# EAGLE board Electronics_Design_v1 v37 (EAGLE 9.7.0), part 1 of 2
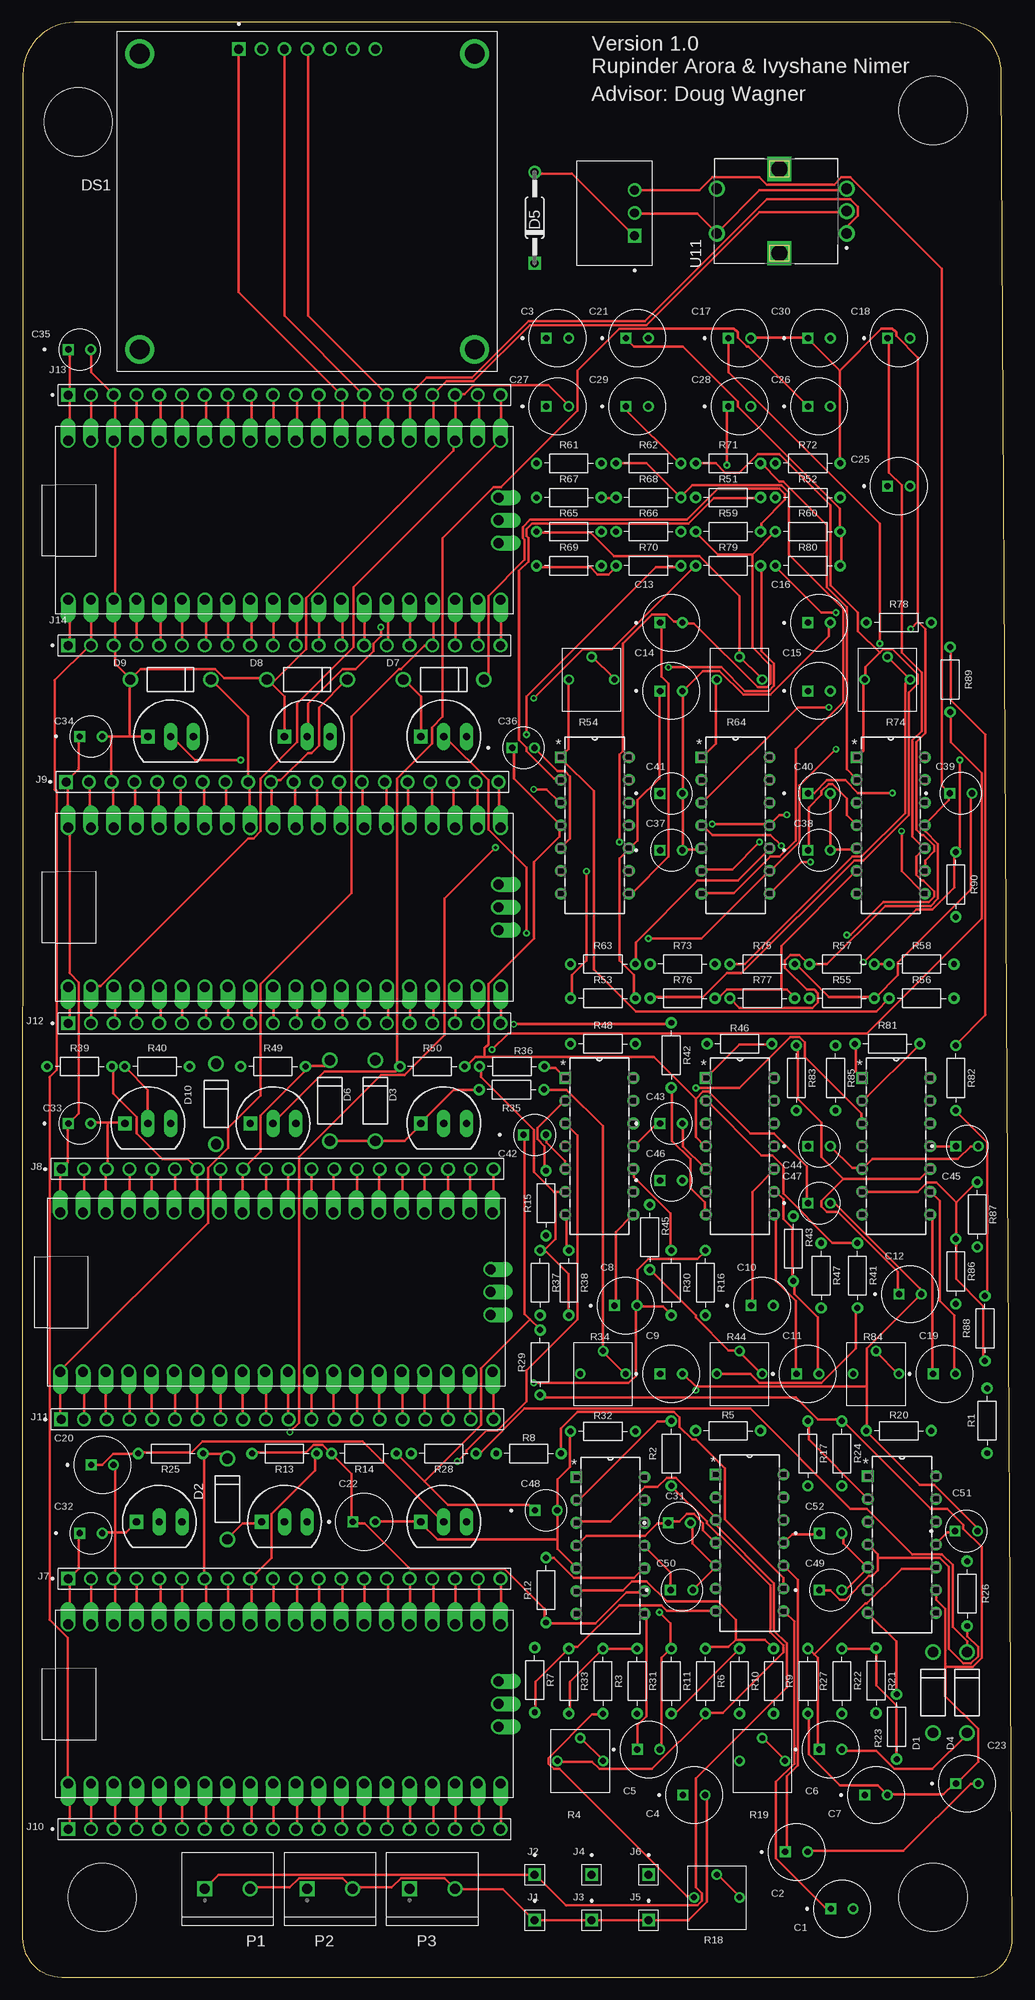
[diagram p0: board, top side]
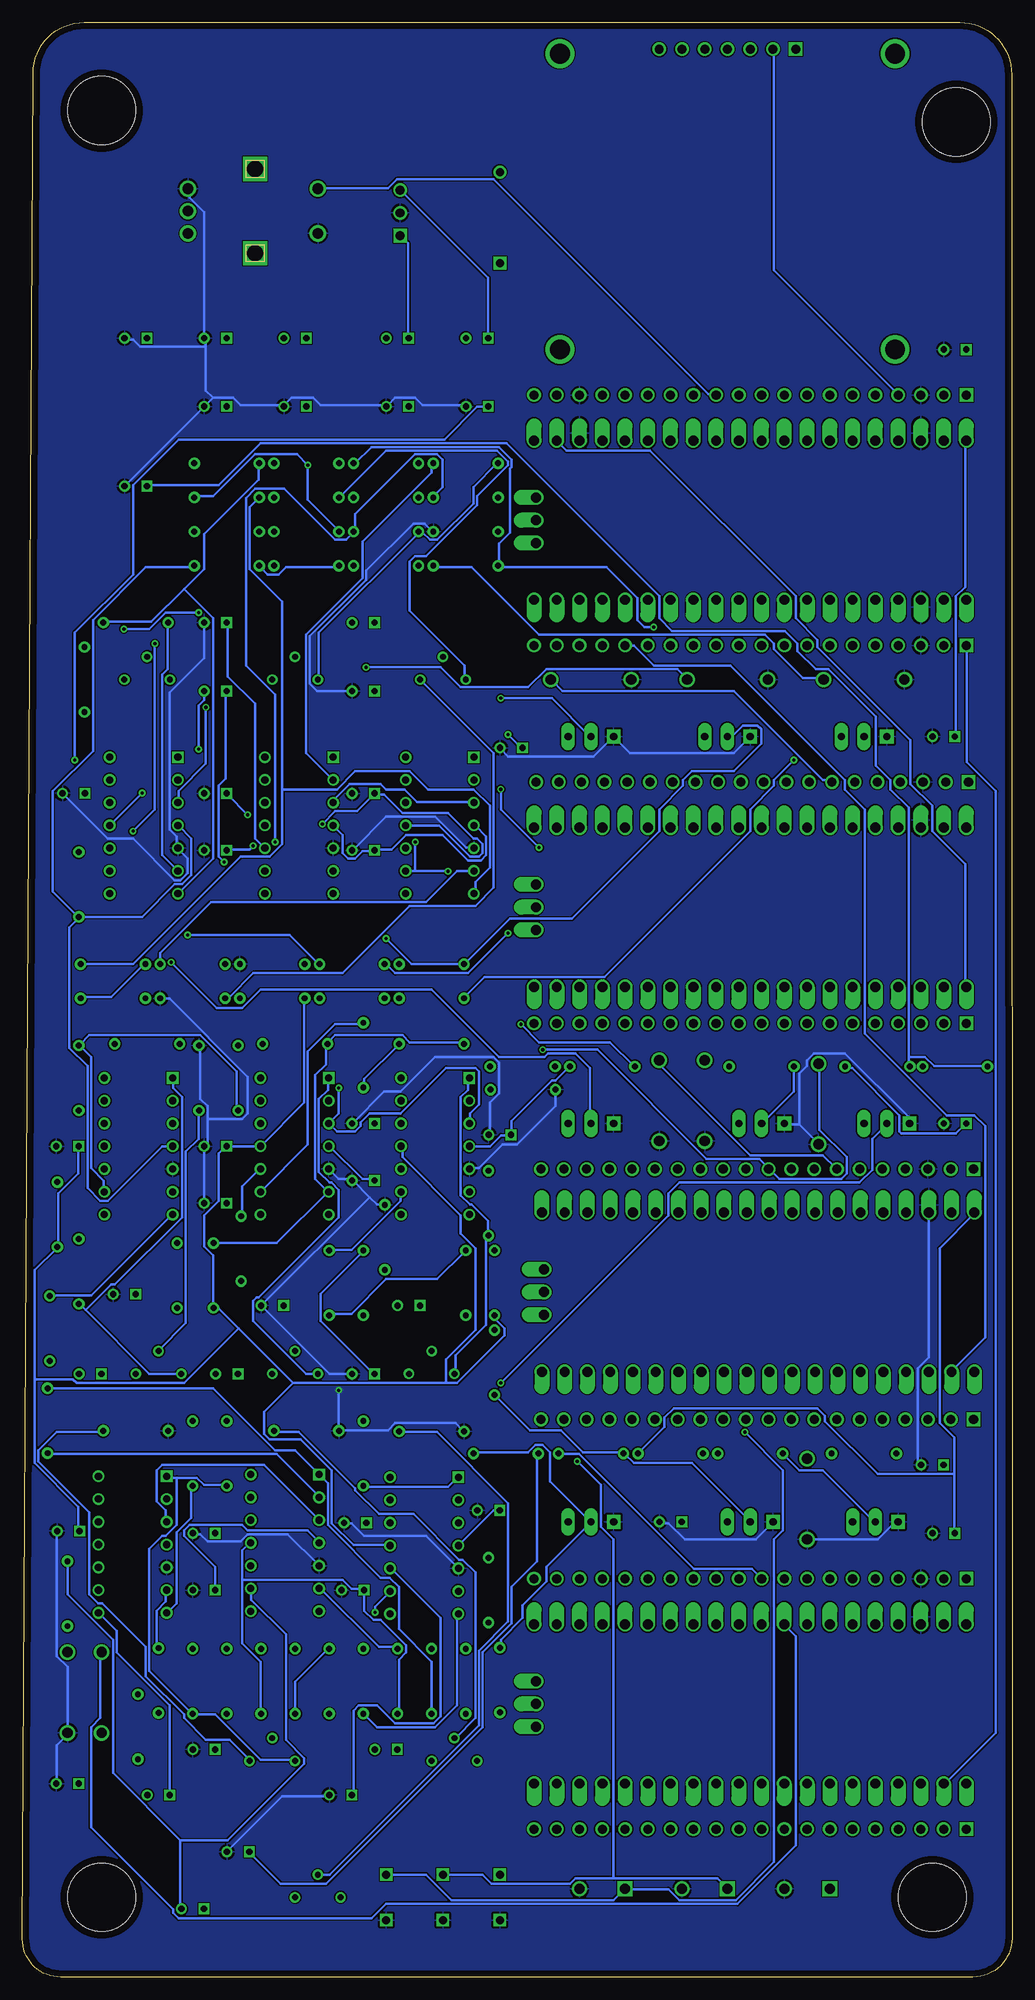
[diagram p1: board, bottom side, seen from below]

Size 110.47 x 218.11 mm. Coordinates in mm from the lower left corner, seen from the top.
Outline: 0.06,212.3 0,4.36 arc90 4.38,0 106.22,0 arc90 110.47,4.28 109.26,212.46 arc90 103.58,218.11 5.84,218.11 arc90 0.06,212.3
Copper layers (1*16): Top / Bottom
Stack-up Default Layer Stack: Top User Defined 0.035mm / Dielectric-1 User Defined 1.5mm / Bottom User Defined 0.035mm
Design rules "default *": minimum track width 10mil, minimum drill 0.35mm, track to track 6mil, track to pad 6mil, pad to pad 6mil, via to via 6mil, smd to smd 6mil, copper to edge 30mil, drill to drill 6mil, minimum pad ring 10mil, minimum via ring 8mil, stop-mask expansion 4mil, vias tented up to drill 0mil, thermal gap 10mil
Holes 7.62 mm at 101.63,208.28 6.24,207.01 8.92,8.89 101.63,8.89

## Footprints (pad centres in the part's own frame; a part is rotated, then mirrored left to right if it is on the bottom)
CAPPRD250W50D630H1250 = drill 0.7 pad 1.05: N 1.25,0 | drill 0.7 pad 1.05 square: P -1.25,0
FAIRCHILD_SEMICONDUCTOR_1N4728A_0 = drill 1.15 pad 1.65: 1 -4.5,0; 2 4.5,0
DO35-4 = drill 0.9 pad 1.422: A 5.08,0 | drill 0.9 pad 1.422 square: C -5.08,0
LCD_AOM12864A0-1.54WW-ANO = drill 1 square: 1 -7.62,17 | drill 1: 2 -5.08,17; 3 -2.54,17; 4 0,17; 5 2.54,17; 6 5.08,17; 7 7.62,17 | drill 2.2: P1 -18.7,16.5; P2 18.7,16.5; P3 -18.7,-16.5; P4 18.7,-16.5
TE_103321-1 = drill 0.89 square: 1 0,0
TE_5-644456-0 = drill 1.02 pad 1.37 square: 1 0,0 | drill 1.02 pad 1.37: 2 2.54,0; 3 5.08,0; 4 7.62,0; 5 10.16,0; 6 12.7,0; 7 15.24,0; 8 17.78,0; 9 20.32,0; 10 22.86,0; 11 25.4,0; 12 27.94,0; 13 30.48,0; 14 33.02,0; 15 35.56,0; 16 38.1,0; 17 40.64,0; 18 43.18,0; 19 45.72,0; 20 48.26,0
TE_282837-2 = drill 1.1 square: 1 -2.54,0 | drill 1.1: 2 2.54,0
RPI_PICO_TH = drill 1.1 pad 1.6 offset: 3V3 8.89,13.97; 3V3_EN 8.89,16.51; ADC_VREF 8.89,11.43; AGND 8.89,6.35; GND@1 -8.89,19.05; GND@2 -8.89,6.35; GND@3 -8.89,-6.35; GND@4 -8.89,-19.05; GND@5 0,-23.9; GND@6 8.89,-19.05; GND@7 8.89,-6.35; GND@8 8.89,19.05; GP0 -8.89,24.13; GP1 -8.89,21.59; GP2 -8.89,16.51; GP3 -8.89,13.97; GP4 -8.89,11.43; GP5 -8.89,8.89; GP6 -8.89,3.81; GP7 -8.89,1.27; GP8 -8.89,-1.27; GP9 -8.89,-3.81; GP10 -8.89,-8.89; GP11 -8.89,-11.43; GP12 -8.89,-13.97; GP13 -8.89,-16.51; GP14 -8.89,-21.59; GP15 -8.89,-24.13; GP16 8.89,-24.13; GP17 8.89,-21.59; GP18 8.89,-16.51; GP19 8.89,-13.97; GP20 8.89,-11.43; GP21 8.89,-8.89; GP22 8.89,-3.81; GP26_A0 8.89,1.27; GP27_A1 8.89,3.81; GP28_A2 8.89,8.89; RUN 8.89,-1.27; SWCLK -2.54,-23.9; SWDIO 2.54,-23.9; VBUS 8.89,24.13; VSYS 8.89,21.59
CONV_R-78E5.0-1.0 = drill 1 square: 1 -2.54,-2.25 | drill 1: 2 0,-2.25; 3 2.54,-2.25
RESAD724W46L381D178B = drill 0.66 pad 1.26: 1 -3.62,0; 2 3.62,0
3362P-1-103LF = drill 0.66: 1 -2.54,0; 2 0,2.54; 3 2.54,0
LP3 = drill 0.813 pad 1.524 square: 1 -3.81,0 | drill 0.813 pad 1.524 long: 2 -1.27,0; 3 1.27,0
N14 = drill 0.787 pad 1.295 square: 1 -7.62,15.24 | drill 0.787 pad 1.295: 2 -7.62,12.7; 3 -7.62,10.16; 4 -7.62,7.62; 5 -7.62,5.08; 6 -7.62,2.54; 7 -7.62,0; 8 0,0; 9 0,2.54; 10 0,5.08; 11 0,7.62; 12 0,10.16; 13 0,12.7; 14 0,15.24
CUI_ACZ11BR1E-20FD1-20C = drill 1.2: A -2.5,-7.5; B 2.5,-7.5; C 0,-7.5; S1 -2.5,7; S2 2.5,7 | drill 1.8 square: P1 -4.7,0; P2 4.7,0

## Placement (x,y rotation side)
C1  2.2nF  [CAPPRD250W50D630H1250]  91.47,7.62 0 top
C2  1nF  [CAPPRD250W50D630H1250]  86.39,13.97 0 top
C3  22uF  [CAPPRD250W50D630H1250]  59.72,182.88 0 top
C4  1nF  [CAPPRD250W50D630H1250]  74.96,20.32 0 top
C5  2.2nF  [CAPPRD250W50D630H1250]  69.88,25.4 0 top
C6  1nF  [CAPPRD250W50D630H1250]  90.2,25.4 0 top
C7  2.2nF  [CAPPRD250W50D630H1250]  95.28,20.32 0 top
C8  2.2nF  [CAPPRD250W50D630H1250]  67.34,74.93 0 top
C9  1nF  [CAPPRD250W50D630H1250]  72.42,67.31 0 top
C10  1nF  [CAPPRD250W50D630H1250]  82.58,74.93 0 top
C11  2.2nF  [CAPPRD250W50D630H1250]  87.66,67.31 0 top
C12  1nF  [CAPPRD250W50D630H1250]  99.09,76.2 0 top
C13  2.2nF  [CAPPRD250W50D630H1250]  72.42,151.13 0 top
C14  1nF  [CAPPRD250W50D630H1250]  72.42,143.51 0 top
C15  2.2nF  [CAPPRD250W50D630H1250]  88.93,143.51 0 top
C16  1nF  [CAPPRD250W50D630H1250]  88.93,151.13 0 top
C17  2.2nF  [CAPPRD250W50D630H1250]  80.04,182.88 0 top
C18  1nF  [CAPPRD250W50D630H1250]  97.82,182.88 0 top
C19  2.2uF  [CAPPRD250W50D630H1250]  102.9,67.31 0 top
C20  2.2uF  [CAPPRD250W50D630H1250]  8.92,57.15 0 top
C21  10uF  [CAPPRD250W50D630H1250]  68.61,182.88 0 top
C22  2.2uF  [CAPPRD250W50D630H1250]  38.13,50.8 0 top
C23  2.2uF  [CAPPRD250W50D630H1250]  105.44,21.59 0 top
C25  2.2uF  [CAPPRD250W50D630H1250]  97.82,166.37 0 top
C26  2.2uF  [CAPPRD250W50D630H1250]  88.93,175.26 0 top
C27  2.2uF  [CAPPRD250W50D630H1250]  59.72,175.26 0 top
C28  2.2uF  [CAPPRD250W50D630H1250]  80.04,175.26 0 top
C29  2.2uF  [CAPPRD250W50D630H1250]  68.61,175.26 0 top
C30  2.2uF  [CAPPRD250W50D630H1250]  88.93,182.88 0 top
C31  0.1uF  [CAPPRD250W50D630H1250]  73.32,50.69 0 top
C32  0.1uF  [CAPPRD250W50D630H1250]  7.65,49.53 0 top
C33  0.1uF  [CAPPRD250W50D630H1250]  6.38,95.25 0 top
C34  0.1uF  [CAPPRD250W50D630H1250]  7.65,138.43 0 top
C35  0.1uF  [CAPPRD250W50D630H1250]  6.38,181.61 0 top
C36  0.1uF  [CAPPRD250W50D630H1250]  55.91,137.16 0 top
C37  0.1uF  [CAPPRD250W50D630H1250]  72.42,125.73 0 top
C38  0.1uF  [CAPPRD250W50D630H1250]  88.93,125.73 0 top
C39  0.1uF  [CAPPRD250W50D630H1250]  104.75,132.09 0 top
C40  0.1uF  [CAPPRD250W50D630H1250]  88.93,132.08 0 top
C41  0.1uF  [CAPPRD250W50D630H1250]  72.42,132.08 0 top
C42  0.1uF  [CAPPRD250W50D630H1250]  57.18,93.98 0 top
C43  0.1uF  [CAPPRD250W50D630H1250]  72.42,95.25 0 top
C44  0.1uF  [CAPPRD250W50D630H1250]  88.93,92.71 0 top
C45  0.1uF  [CAPPRD250W50D630H1250]  105.44,92.71 0 top
C46  0.1uF  [CAPPRD250W50D630H1250]  72.42,88.9 0 top
C47  0.1uF  [CAPPRD250W50D630H1250]  88.93,86.36 0 top
C48  0.1uF  [CAPPRD250W50D630H1250]  58.45,52.07 0 top
C49  0.1uF  [CAPPRD250W50D630H1250]  90.2,43.18 0 top
C50  0.1uF  [CAPPRD250W50D630H1250]  73.59,43.18 0 top
C51  0.1uF  [CAPPRD250W50D630H1250]  105.34,49.77 0 top
C52  0.1uF  [CAPPRD250W50D630H1250]  90.2,49.53 0 top
D1  FAIRCHILD_SEMICONDUCTOR_1N4728AFAIRCHILD_SEMICONDUCTOR_1N4728A_0_0  [FAIRCHILD_SEMICONDUCTOR_1N4728A_0]  101.63,31.75 90 top
D2  FAIRCHILD_SEMICONDUCTOR_1N4728AFAIRCHILD_SEMICONDUCTOR_1N4728A_0_0  [FAIRCHILD_SEMICONDUCTOR_1N4728A_0]  22.89,53.34 90 top
D3  FAIRCHILD_SEMICONDUCTOR_1N4728AFAIRCHILD_SEMICONDUCTOR_1N4728A_0_0  [FAIRCHILD_SEMICONDUCTOR_1N4728A_0]  39.4,97.79 90 top
D4  FAIRCHILD_SEMICONDUCTOR_1N4728AFAIRCHILD_SEMICONDUCTOR_1N4728A_0_0  [FAIRCHILD_SEMICONDUCTOR_1N4728A_0]  105.44,31.75 90 top
D5  1N914.4  [DO35-4]  57.18,196.32 90 top
D6  FAIRCHILD_SEMICONDUCTOR_1N4728AFAIRCHILD_SEMICONDUCTOR_1N4728A_0_0  [FAIRCHILD_SEMICONDUCTOR_1N4728A_0]  34.32,97.79 90 top
D7  FAIRCHILD_SEMICONDUCTOR_1N4728AFAIRCHILD_SEMICONDUCTOR_1N4728A_0_0  [FAIRCHILD_SEMICONDUCTOR_1N4728A_0]  47.02,144.78 0 top
D8  FAIRCHILD_SEMICONDUCTOR_1N4728AFAIRCHILD_SEMICONDUCTOR_1N4728A_0_0  [FAIRCHILD_SEMICONDUCTOR_1N4728A_0]  31.78,144.78 0 top
D9  FAIRCHILD_SEMICONDUCTOR_1N4728AFAIRCHILD_SEMICONDUCTOR_1N4728A_0_0  [FAIRCHILD_SEMICONDUCTOR_1N4728A_0]  16.54,144.78 0 top
D10  FAIRCHILD_SEMICONDUCTOR_1N4728AFAIRCHILD_SEMICONDUCTOR_1N4728A_0_0  [FAIRCHILD_SEMICONDUCTOR_1N4728A_0]  21.62,97.42 90 top
DS1  OLED Display  [LCD_AOM12864A0-1.54WW-ANO]  31.78,198.12 0 top
J1  103321-1  [TE_103321-1]  57.18,6.35 0 top
J2  103321-1  [TE_103321-1]  57.18,11.43 0 top
J3  103321-1  [TE_103321-1]  63.53,6.35 0 top
J4  103321-1  [TE_103321-1]  63.53,11.43 0 top
J5  103321-1  [TE_103321-1]  69.88,6.35 0 top
J6  103321-1  [TE_103321-1]  69.88,11.43 0 top
J7  5-644456-0  [TE_5-644456-0]  5.11,44.45 0 top
J8  5-644456-0  [TE_5-644456-0]  4.32,90.16 0 top
J9  5-644456-0  [TE_5-644456-0]  4.88,133.35 0 top
J10  5-644456-0  [TE_5-644456-0]  5.11,16.51 0 top
J11  5-644456-0  [TE_5-644456-0]  4.32,62.23 0 top
J12  5-644456-0  [TE_5-644456-0]  5.11,106.42 0 top
J13  5-644456-0  [TE_5-644456-0]  5.11,176.53 0 top
J14  5-644456-0  [TE_5-644456-0]  5.11,148.59 0 top
P1  282837-2  [TE_282837-2]  22.89,9.84 0 top
P2  282837-2  [TE_282837-2]  34.32,9.84 0 top
P3  282837-2  [TE_282837-2]  45.75,9.84 0 top
PICO-1  Piico Pi  [RPI_PICO_TH]  29.24,30.48 90 top
PICO-2  [RPI_PICO_TH]  28.35,76.44 90 top
PICO-3  [RPI_PICO_TH]  29.24,119.38 90 top
PICOCENTRAL  [RPI_PICO_TH]  29.24,162.56 90 top
PS1  R-78E5.0-1.0  [CONV_R-78E5.0-1.0]  66.07,196.85 90 top
R1  560k  [RESAD724W46L381D178B]  107.67,62.09 270 top
R2  560k  [RESAD724W46L381D178B]  72.42,58.42 90 top
R3  1.8k  [RESAD724W46L381D178B]  64.8,33.02 90 top
R4  10k  [3362P-1-103LF]  62.26,24.13 0 top
R5  100  [RESAD724W46L381D178B]  78.77,60.96 180 top
R6  1.8k  [RESAD724W46L381D178B]  76.23,33.02 90 top
R7  100k  [RESAD724W46L381D178B]  57.18,33.14 90 top
R8  100k  [RESAD724W46L381D178B]  56.51,58.42 180 top
R9  5.6k  [RESAD724W46L381D178B]  83.85,33.02 90 top
R10  1.8k  [RESAD724W46L381D178B]  80.04,33.02 90 top
R11  100k  [RESAD724W46L381D178B]  72.42,33.02 90 top
R12  100k  [RESAD724W46L381D178B]  58.45,43.18 90 top
R13  150  [RESAD724W46L381D178B]  29.24,58.42 0 top
R14  200  [RESAD724W46L381D178B]  38.13,58.42 0 top
R15  560k  [RESAD724W46L381D178B]  58.45,86.36 90 top
R16  100k  [RESAD724W46L381D178B]  76.23,77.47 90 top
R17  560k  [RESAD724W46L381D178B]  87.66,58.42 90 top
R18  10k  [3362P-1-103LF]  77.5,8.89 0 top
R19  10k  [3362P-1-103LF]  82.58,24.13 0 top
R20  100  [RESAD724W46L381D178B]  97.82,60.96 180 top
R21  1.8k  [RESAD724W46L381D178B]  91.47,33.02 90 top
R22  5.6k  [RESAD724W46L381D178B]  95.28,33.09 90 top
R23  1.8k  [RESAD724W46L381D178B]  97.57,27.94 90 top
R24  100k  [RESAD724W46L381D178B]  91.47,58.42 90 top
R25  150  [RESAD724W46L381D178B]  16.54,58.42 0 top
R26  200  [RESAD724W46L381D178B]  105.44,42.78 270 top
R27  100k  [RESAD724W46L381D178B]  87.66,33.02 90 top
R28  150  [RESAD724W46L381D178B]  47.02,58.42 0 top
R29  200  [RESAD724W46L381D178B]  57.78,68.58 90 top
R30  100k  [RESAD724W46L381D178B]  72.42,77.47 90 top
R31  5.6k  [RESAD724W46L381D178B]  68.61,33.02 90 top
R32  100  [RESAD724W46L381D178B]  64.8,60.89 180 top
R33  1.8k  [RESAD724W46L381D178B]  60.99,33.02 90 top
R34  10k  [3362P-1-103LF]  64.8,67.31 0 top
R35  100  [RESAD724W46L381D178B]  54.6,99.02 180 top
R36  1.8k  [RESAD724W46L381D178B]  54.64,101.6 180 top
R37  5.6k  [RESAD724W46L381D178B]  57.78,77.47 90 top
R38  1.8k  [RESAD724W46L381D178B]  60.99,77.47 90 top
R39  150  [RESAD724W46L381D178B]  6.38,101.6 0 top
R40  200  [RESAD724W46L381D178B]  15.03,101.61 0 top
R41  560k  [RESAD724W46L381D178B]  93.2,78.28 90 top
R42  100k  [RESAD724W46L381D178B]  72.42,102.87 90 top
R43  100k  [RESAD724W46L381D178B]  86.06,81.28 90 top
R44  10k  [3362P-1-103LF]  80.04,67.31 0 top
R45  100  [RESAD724W46L381D178B]  70.02,82.55 90 top
R46  1.8k  [RESAD724W46L381D178B]  80.04,104.14 180 top
R47  5.6k  [RESAD724W46L381D178B]  89.14,78.28 90 top
R48  1.8k  [RESAD724W46L381D178B]  64.8,104.14 0 top
R49  150  [RESAD724W46L381D178B]  27.97,101.6 0 top
R50  200  [RESAD724W46L381D178B]  45.75,101.6 0 top
R51  560k  [RESAD724W46L381D178B]  78.77,165.1 0 top
R52  100k  [RESAD724W46L381D178B]  87.66,165.1 0 top
R53  100k  [RESAD724W46L381D178B]  64.8,109.22 0 top
R54  10k  [3362P-1-103LF]  63.53,144.78 0 top
R55  100  [RESAD724W46L381D178B]  91.47,109.22 0 top
R56  1.8k  [RESAD724W46L381D178B]  100.36,109.22 0 top
R57  5.6k  [RESAD724W46L381D178B]  91.47,113.03 0 top
R58  1.8k  [RESAD724W46L381D178B]  100.36,113.03 0 top
R59  150  [RESAD724W46L381D178B]  78.77,161.29 0 top
R60  200  [RESAD724W46L381D178B]  87.66,161.29 0 top
R61  560k  [RESAD724W46L381D178B]  60.99,168.91 0 top
R62  100k  [RESAD724W46L381D178B]  69.88,168.91 0 top
R63  100k  [RESAD724W46L381D178B]  64.8,113.03 0 top
R64  10k  [3362P-1-103LF]  80.04,144.78 0 top
R65  100  [RESAD724W46L381D178B]  60.99,161.29 0 top
R66  1.8k  [RESAD724W46L381D178B]  69.88,161.29 0 top
R67  5.6k  [RESAD724W46L381D178B]  60.99,165.1 0 top
R68  1.8k  [RESAD724W46L381D178B]  69.88,165.1 0 top
R69  150  [RESAD724W46L381D178B]  60.99,157.48 0 top
R70  200  [RESAD724W46L381D178B]  69.88,157.48 0 top
R71  560k  [RESAD724W46L381D178B]  78.77,168.91 0 top
R72  100k  [RESAD724W46L381D178B]  87.66,168.91 0 top
R73  100k  [RESAD724W46L381D178B]  73.69,113.03 0 top
R74  10k  [3362P-1-103LF]  96.55,144.78 0 top
R75  100  [RESAD724W46L381D178B]  82.58,113.03 0 top
R76  1.8k  [RESAD724W46L381D178B]  73.69,109.22 0 top
R77  5.6k  [RESAD724W46L381D178B]  82.58,109.22 0 top
R78  1.8k  [RESAD724W46L381D178B]  97.82,151.13 0 top
R79  150  [RESAD724W46L381D178B]  78.77,157.48 0 top
R80  200  [RESAD724W46L381D178B]  87.66,157.48 0 top
R81  560k  [RESAD724W46L381D178B]  96.55,104.14 0 top
R82  100k  [RESAD724W46L381D178B]  104.17,100.33 90 top
R83  100k  [RESAD724W46L381D178B]  86.39,100.33 90 top
R84  10k  [3362P-1-103LF]  95.28,67.31 0 top
R85  100  [RESAD724W46L381D178B]  90.76,100.33 90 top
R86  1.8k  [RESAD724W46L381D178B]  104.17,78.74 90 top
R87  5.6k  [RESAD724W46L381D178B]  106.57,85.09 90 top
R88  1.8k  [RESAD724W46L381D178B]  107.43,72.39 90 top
R89  150  [RESAD724W46L381D178B]  103.54,144.78 270 top
R90  200  [RESAD724W46L381D178B]  104.17,121.92 270 top
U1  LM4040AIZ-4.1/NOPBLP3  [LP3]  16.54,50.8 0 top
U2  TL084CNN14  [N14]  68.2,85.09 0 top
U3  TL084CNN14  [N14]  101.98,40.64 0 top
U4  LM4040AIZ-4.1/NOPBLP3  [LP3]  30.51,50.8 0 top
U5  LM4040AIZ-4.1/NOPBLP3  [LP3]  29.24,95.25 0 top
U6  TL084CNN14  [N14]  83.9,85.09 0 top
U7  LM4040AIZ-4.1/NOPBLP3  [LP3]  48.29,95.25 0 top
U8  LM4040AIZ-4.1/NOPBLP3  [LP3]  15.27,95.25 0 top
U9  TL084CNN14  [N14]  67.69,120.89 0 top
U10  LM4040AIZ-4.1/NOPBLP3  [LP3]  17.81,138.43 0 top
U11  Rotary Encoder  [CUI_ACZ11BR1E-20FD1-20C]  84.5,197.06 90 top
U12  TL084CNN14  [N14]  83.41,120.89 0 top
U13  TL084CNN14  [N14]  84.97,40.83 0 top
U14  TL084CNN14  [N14]  69.44,40.53 0 top
U15  LM4040AIZ-4.1/NOPBLP3  [LP3]  48.29,138.43 0 top
U16  TL084CNN14  [N14]  100.73,120.89 0 top
U18  TL084CNN14  [N14]  101.33,85.09 0 top
U19  LM4040AIZ-4.1/NOPBLP3  [LP3]  33.05,138.43 0 top
U20  LM4040AIZ-4.1/NOPBLP3  [LP3]  48.29,50.8 0 top

## Library data of the parts
C1-C23 C25-C52 = UPM2A100MED; A_MAX: 12.5; B_MAX: 0.5; B_NOM: 0.5; DESCRIPTION: CAP ALUM 10UF 20% 100V RADIAL; D_NOM: 6.3; E_NOM: 2.5; MF: NICHICON
D1-D4 D6-D10 = Fairchild Semiconductor - 1N4728A; COMPONENT_LINK_1_DESCRIPTION: Manufacturer URL; COMPONENT_LINK_1_URL: http://www.fairchildsemi.com/; COMPONENT_LINK_3_DESCRIPTION: Package Specification; COMPONENT_LINK_3_URL: http://www.fairchildsemi.com/dwg/DO/DO41A.pdf; DATASHEET: http://www.fairchildsemi.com/ds/1N/1N4744A.pdf; DATASHEET_VERSION: Rev. H3; FOOTPRINT_VARIANT_NAME_0: Manufacturer Recommended; IMPORTED: yes; IMPORTED_FROM: vault; IMPORT_TS: 1521843604; IR_UA: 100; MF: Fairchild Semiconductor; MOUNTING_TECHNOLOGY: Through Hole; MPN: 1N4728A; OPERATING_AND_STORAGE_TEMPERATURE_RANGE: -65 to 200 degC; PACKAGE: DO-41-2; PACKAGE_DESCRIPTION: 2-Pin Axial leaded, Body 2.72 x 5.2 mm, Lead Spread 25.4 mm; PACKAGE_VERSION: Rev. 2; PD_W: 1; PREFIX: D; RELEASE_DATE: 1396598095; ROHS: Yes; TEST_CURRENT_IZ_MA: 76; TOLERANCE: 5%; VAULT_GUID: BB5BB100-3A3D-49B5-B4BA-51B09125605A; VAULT_REVISION: 7D3D7113-8068-4E65-AD6A-1728C093E95D; VZ_MAX_V: 3.465; VZ_MIN_V: 3.135; ZZ_MAX_OHM: 10
D5 = 1N914
DS1 = AOM12864A0-1.54WW-ANO; MANUFACTURER: Orient Display; MAXIMUM_PACKAGE_HEIGHT: 5.5mm; PARTREV: O; STANDARD: Manufacturer Recommendations
J1-J6 = 103321-1; COMMENT: 103321-1
J7-J14 = 5-644456-0; COMMENT: 5-644456-0; EU_ROHS_COMPLIANCE: Compliant
P1-P3 = 282837-2; COMMENT: 282837-2
PICO-1-PICO-3 PICOCENTRAL = RaspberryPi_Pico
PS1 = R-78E5.0-1.0; MANUFACTURER: RECOM; MAXIMUM_PACKAGE_HEIGHT: 10.40mm; PARTREV: 6; STANDARD: Manufacturer Recommendations
R1 R2 R5 R13 R15 R17 R20 R25 R28 R32 R35 R39 R41 R45 R49 R51 R55 R59 R61 R65 R69 R71 R75 R79 R81 R85 R89 = Resistor; CATEGORY: Resistor; SUB-CATEGORY: Fixed
R3 R6-R12 R14 R16 R21-R24 R26 R27 R29-R31 R33 R36-R38 R40 R42 R43 R46-R48 R50 R52 R53 R56-R58 R60 R62 R63 R66-R68 R70 R72 R73 R76-R78 R80 R82 R83 R86-R88 R90 = Tutorial - Fusion 360; CATEGORY: Resistor; SUB-CATEGORY: Fixed
R4 R18 R19 R34 R44 R54 R64 R74 R84 = Potentiometer_Trimmers; CREATED_PN: PCBLayout.com; DIGIKEY_PN: 3362P-103LF-ND; MANUFACTURER: Bourns Inc.; MPN: 3362P-1-103LF
U1 U4 U5 U7 U8 U10 U15 U19 U20 = Library; COPYRIGHT: Copyright (C) 2023 Ultra Librarian. All rights reserved.; MANUFACTURER_PART_NUMBER: LM4040AIZ-4.1/NOPB; MFR_NAME: Texas Instruments
U2 U3 U6 U9 U12-U14 U16 U18 = 2023-02-17_00-49-57_Library; COPYRIGHT: Copyright (C) 2023 Ultra Librarian. All rights reserved.; MANUFACTURER_PART_NUMBER: TL084CN; MFR_NAME: Texas Instruments
U11 = ACZ11BR1E-20FD1-20C; MANUFACTURER: CUI Devices; MAXIMUM_PACKAGE_HEIGHT: 26.5mm; PARTREV: 1.02; STANDARD: Manufacturer Recommendations

## Nets
+5V2: C21.P C31.P C32.P C33.P C34.P C35.P C36.P C37.P C38.P C42.P C46.P C47.P C48.P C49.P D5.A J7.1 J8.1 J9.1 J13.1 PICO-1.VBUS PICO-2.VBUS PICO-3.VBUS PICOCENTRAL.VBUS PS1.1 R14.2 R26.2 R29.2 R40.2 R50.2 R60.2 R70.2 R80.2 R90.2 U2.4 U3.4 U6.4 U9.4 U12.4 U13.4 U14.4 U16.4 U18.4
-5V: C3.P C39.P C40.P C41.P C43.P C44.P C45.P C50.P C51.P C52.P PS1.3 R9.1 R31.1 R37.1 R47.1 R57.1 R77.1 R87.1 U2.11 U3.11 U6.11 U9.11 U12.11 U13.11 U14.11 U16.11 U18.11
GND: C2.N C4.N C6.N C9.N C10.N C12.N C14.N C16.N C18.N C20.N C22.N C23.N C25.N C26.N C27.N C28.N C29.N C30.N C31.N C32.N C33.N C34.N C35.N C36.N C37.N C38.N C39.N C40.N C41.N C42.N C43.N C44.N C45.N C46.N C47.N C48.N C49.N C50.N C51.N C52.N D2.1 D3.1 D4.1 D6.1 D7.1 D8.1 D9.1 D10.1 J1.1 J3.1 J5.1 J7.3 J8.3 J9.3 J13.3 J13.18 J14.3 P1.2 P2.2 P3.2 PICO-1.GND@8 PICO-2.GND@8 PICO-3.GND@8 PICOCENTRAL.GND@1 PICOCENTRAL.GND@6 PICOCENTRAL.GND@8 PS1.2 R5.2 R20.2 R32.2 R35.2 R45.2 R55.2 R65.2 R75.2 R85.2 U1.1 U2.5 U3.5 U4.1 U5.1 U6.5 U7.1 U8.1 U9.5 U10.1 U11.B U11.S1 U12.5 U13.5 U14.5 U15.1 U16.5 U18.5 U19.1 U20.1
N$1: C5.P U14.8
N$2: R1.2 U13.2
N$3: C8.N C25.P R16.2 R30.1 R39.1 R40.1 U2.9 U8.2
N$4: R4.2 R4.3 R5.1
N$5: R2.2 U14.2
N$6: R2.1 R4.1 R6.1 U14.1
N$7: R6.2 R9.2 R10.1 U14.6
N$8: C1.P U13.8
N$9: C5.N C22.P R11.2 R12.1 R13.1 R14.1 U1.2 U14.9
N$10: D2.2 J7.7 PICO-1.GP28_A2 R25.2
N$11: R22.1
N$12: J8.4 PICO-2.3V3_EN
N$13: C4.P R12.2 U14.10
N$14: C11.N C26.P R42.2 R43.1 R49.1 R50.1 U5.2 U6.9
N$16: C3.N
N$17: D5.C
N$18: C21.N
N$19: J6.1 P3.1 U9.3 U12.3 U16.3
N$20: R10.2 R11.1 U14.7
N$21: C6.P R27.2 U3.10
N$22: J4.1 P2.1 U2.3 U6.3 U18.3
N$23: D1.2 J7.9 PICO-1.GP27_A1 R13.2
N$24: R19.2 R19.3 R20.1
N$25: R17.2 U3.2
N$26: R17.1 R19.1 R21.1 U3.1
N$27: R21.2 R22.2 R23.1 U3.6
N$28: R23.2 R24.1 U3.7
N$29: R15.2 U2.2
N$30: C27.P R90.1 U7.2
N$31: C7.P U3.8
N$32: J9.4 PICO-3.3V3_EN
N$33: C9.P R30.2 U2.10
N$34: C7.N C23.P R24.2 R27.1 R28.1 R29.1 U3.9 U4.2
N$35: D4.2 J7.10 PICO-1.GP26_A0 R28.2
N$36: R15.1 R34.1 R36.1 U2.1
N$37: R34.2 R34.3 R35.1
N$38: R36.2 R37.2 R38.1 U2.6
N$39: R16.1 R38.2 U2.7
N$40: C13.N C28.P R52.2 R53.1 R59.1 R60.1 U9.9 U10.2
N$41: C10.P R43.2 U6.10
N$42: C8.P U2.8
N$43: C15.N C29.P R62.2 R63.1 R69.1 R70.1 U12.9 U19.2
N$44: J7.5 PICO-1.3V3
N$45: C11.P U6.8
N$46: C19.P U18.8
N$47: C13.P U9.8
N$48: R41.2 U6.2
N$49: C1.N C20.P R7.2 R8.1 R25.1 R26.1 U13.9 U20.2
N$50: J7.4 PICO-1.3V3_EN
N$51: R41.1 R44.1 R46.1 U6.1
N$52: R44.2 R44.3 R45.1
N$53: D3.2 J8.7 PICO-2.GP28_A2 R39.2
N$54: R46.2 R47.2 R48.1 U6.6
N$55: J10.1 J14.2 PICO-1.GP0 PICOCENTRAL.GP1
N$56: R42.1 R48.2 U6.7
N$57: J10.2 J14.1 PICO-1.GP1 PICOCENTRAL.GP0
N$58: J14.19 PICOCENTRAL.GP14
N$59: J11.1 J14.17 PICO-2.GP0 PICOCENTRAL.GP13
N$60: J11.2 J14.16 PICO-2.GP1 PICOCENTRAL.GP12
N$61: J12.1 J13.19 PICO-3.GP0 PICOCENTRAL.GP17
N$62: J12.2 J13.20 PICO-3.GP1 PICOCENTRAL.GP16
N$63: J14.20 PICOCENTRAL.GP15
N$64: J13.16 PICOCENTRAL.GP19 U11.A
N$65: J13.17 PICOCENTRAL.GP18 U11.C
N$67: DS1.2 J13.4 PICOCENTRAL.3V3_EN
N$68: DS1.1 J13.13 PICOCENTRAL.GND@7
N$69: DS1.4 J13.15 PICOCENTRAL.GP20
N$70: DS1.3 J13.14 PICOCENTRAL.GP21
N$71: J10.4 PICO-1.GP2
N$72: C17.N C30.P R72.2 R73.1 R79.1 R80.1 U15.2 U16.9
N$73: J2.1 P1.1 U3.3 U13.3 U14.3
N$74: R1.1 R3.1 R18.1 U13.1
N$75: R18.2 R18.3 R32.1
N$76: R3.2 R31.2 R33.1 U13.6
N$77: R7.1 R33.2 U13.7
N$78: C12.P R83.2 U18.10
N$79: C2.P R8.2 U13.10
N$80: J7.2 PICO-1.VSYS
N$81: D6.2 J8.9 PICO-2.GP27_A1 R49.2
N$82: C17.P U16.8
N$83: R71.2 U16.2
N$84: R51.2 U9.2
N$85: R51.1 R54.1 R56.1 U9.1
N$86: R54.2 R54.3 R55.1
N$87: R56.2 R57.2 R58.1 U9.6
N$88: R52.1 R58.2 U9.7
N$89: J7.6 PICO-1.ADC_VREF
N$90: C16.P R63.2 U12.10
N$91: C14.P R53.2 U9.10
N$92: J7.8 PICO-1.AGND
N$93: D7.2 J9.7 PICO-3.GP28_A2 R59.2
N$94: R71.1 R74.1 R76.1 U16.1
N$95: J7.11 PICO-1.RUN
N$96: R61.2 U12.2
N$97: R61.1 R64.1 R66.1 U12.1
N$98: R64.2 R64.3 R65.1
N$99: R66.2 R67.2 R68.1 U12.6
N$100: R62.1 R68.2 U12.7
N$101: C18.P R73.2 U16.10
N$102: C15.P U12.8
N$103: D1.1
N$104: J7.12 PICO-1.GP22
N$105: D9.2 J9.9 PICO-3.GP27_A1 R69.2
N$106: R67.1
N$107: J7.13 PICO-1.GND@7
N$108: R74.2 R74.3 R75.1
N$109: R76.2 R77.2 R78.1 U16.6
N$110: R72.1 R78.2 U16.7
N$111: J7.14 PICO-1.GP21
N$112: J7.15 PICO-1.GP20
N$113: J7.16 PICO-1.GP19
N$114: J7.17 PICO-1.GP18
N$115: D8.2 J9.10 PICO-3.GP26_A0 R79.2
N$116: J7.18 PICO-1.GND@6
N$117: J7.19 PICO-1.GP17
N$118: R81.2 U18.2
N$119: R81.1 R84.1 R86.1 U18.1
N$120: R84.2 R84.3 R85.1
N$121: R86.2 R87.2 R88.1 U18.6
N$122: R82.1 R88.2 U18.7
N$123: C19.N R82.2 R83.1 R89.1 U18.9
N$124: J7.20 PICO-1.GP16
N$125: J8.5 PICO-2.3V3
N$126: J8.2 PICO-2.VSYS
N$127: D10.2 J8.10 PICO-2.GP26_A0 R89.2
N$128: J8.6 PICO-2.ADC_VREF
N$129: J8.8 PICO-2.AGND
N$130: J8.11 PICO-2.RUN
N$131: J8.12 PICO-2.GP22
N$132: J8.13 PICO-2.GND@7
N$133: J8.14 PICO-2.GP21
N$134: J8.15 PICO-2.GP20
N$135: J8.16 PICO-2.GP19
N$136: J8.17 PICO-2.GP18
N$137: J8.18 PICO-2.GND@6
N$138: J8.19 PICO-2.GP17
N$139: J8.20 PICO-2.GP16
N$140: J9.5 PICO-3.3V3
N$141: J9.2 PICO-3.VSYS
N$142: J9.6 PICO-3.ADC_VREF
N$143: J9.8 PICO-3.AGND
N$144: J9.11 PICO-3.RUN
N$145: J9.12 PICO-3.GP22
N$146: J9.13 PICO-3.GND@7
N$147: J9.14 PICO-3.GP21
N$148: J9.15 PICO-3.GP20
N$149: J9.16 PICO-3.GP19
N$150: J9.17 PICO-3.GP18
N$151: J9.18 PICO-3.GND@6
N$152: J9.19 PICO-3.GP17
N$153: J9.20 PICO-3.GP16
N$154: J10.20 PICO-1.GP15
N$155: J10.19 PICO-1.GP14
N$156: J10.18 PICO-1.GND@4
N$157: J10.17 PICO-1.GP13
N$158: J10.16 PICO-1.GP12
N$159: J10.15 PICO-1.GP11
N$160: J10.14 PICO-1.GP10
N$161: J10.13 PICO-1.GND@3
N$162: J10.12 PICO-1.GP9
N$163: J10.11 PICO-1.GP8
N$164: J10.10 PICO-1.GP7
N$165: J10.9 PICO-1.GP6
N$166: J10.8 PICO-1.GND@2
N$167: J10.7 PICO-1.GP5
N$168: J10.6 PICO-1.GP4
N$169: J10.5 PICO-1.GP3
N$170: J14.18 PICOCENTRAL.GND@4
N$171: J10.3 PICO-1.GND@1
N$172: J11.20 PICO-2.GP15
N$173: J11.19 PICO-2.GP14
N$174: J11.18 PICO-2.GND@4
N$175: J11.17 PICO-2.GP13
N$176: J11.16 PICO-2.GP12
N$177: J11.15 PICO-2.GP11
N$178: J11.14 PICO-2.GP10
N$179: J11.13 PICO-2.GND@3
N$180: J11.12 PICO-2.GP9
N$181: J11.11 PICO-2.GP8
N$182: J11.10 PICO-2.GP7
N$183: J11.9 PICO-2.GP6
N$184: J11.8 PICO-2.GND@2
N$185: J11.7 PICO-2.GP5
N$186: J11.6 PICO-2.GP4
N$187: J11.5 PICO-2.GP3
N$188: J11.4 PICO-2.GP2
N$189: J11.3 PICO-2.GND@1
N$190: J12.20 PICO-3.GP15
N$191: J12.19 PICO-3.GP14
N$192: J12.18 PICO-3.GND@4
N$193: J12.17 PICO-3.GP13
N$194: J12.16 PICO-3.GP12
N$195: J12.15 PICO-3.GP11
N$196: J12.14 PICO-3.GP10
N$197: J12.13 PICO-3.GND@3
N$198: J12.12 PICO-3.GP9
N$199: J12.11 PICO-3.GP8
N$200: J12.10 PICO-3.GP7
N$201: J12.9 PICO-3.GP6
N$202: J12.8 PICO-3.GND@2
N$203: J12.7 PICO-3.GP5
N$204: J12.6 PICO-3.GP4
N$205: J12.5 PICO-3.GP3
N$206: J12.4 PICO-3.GP2
N$207: J12.3 PICO-3.GND@1
N$208: J13.2 PICOCENTRAL.VSYS
N$209: J13.5 PICOCENTRAL.3V3
N$210: J13.6 PICOCENTRAL.ADC_VREF
N$211: J13.7 PICOCENTRAL.GP28_A2
N$212: J13.8 PICOCENTRAL.AGND
N$213: J13.9 PICOCENTRAL.GP27_A1
N$214: J13.10 PICOCENTRAL.GP26_A0
N$215: J13.11 PICOCENTRAL.RUN
N$216: J13.12 PICOCENTRAL.GP22 U11.S2
N$218: J14.15 PICOCENTRAL.GP11
N$219: J14.14 PICOCENTRAL.GP10
N$220: J14.13 PICOCENTRAL.GND@3
N$221: J14.12 PICOCENTRAL.GP9
N$222: J14.11 PICOCENTRAL.GP8
N$223: J14.10 PICOCENTRAL.GP7
N$224: J14.9 PICOCENTRAL.GP6
N$225: J14.8 PICOCENTRAL.GND@2
N$226: J14.7 PICOCENTRAL.GP5
N$227: J14.6 PICOCENTRAL.GP4
N$228: J14.5 PICOCENTRAL.GP3
N$229: J14.4 PICOCENTRAL.GP2